# Altium PCB PCB.PcbDoc (part 3 of 3)
Units mil, origin at the board's own origin, x right, y up, seen from the top; angles counter-clockwise.
Board outline 3665 x 1860 mil, 2 copper layers (Top Layer, Bottom Layer); 191 components, 134 nets, 778 pads, 0 vias.
Unrouted connection lines stored in the file: 439.
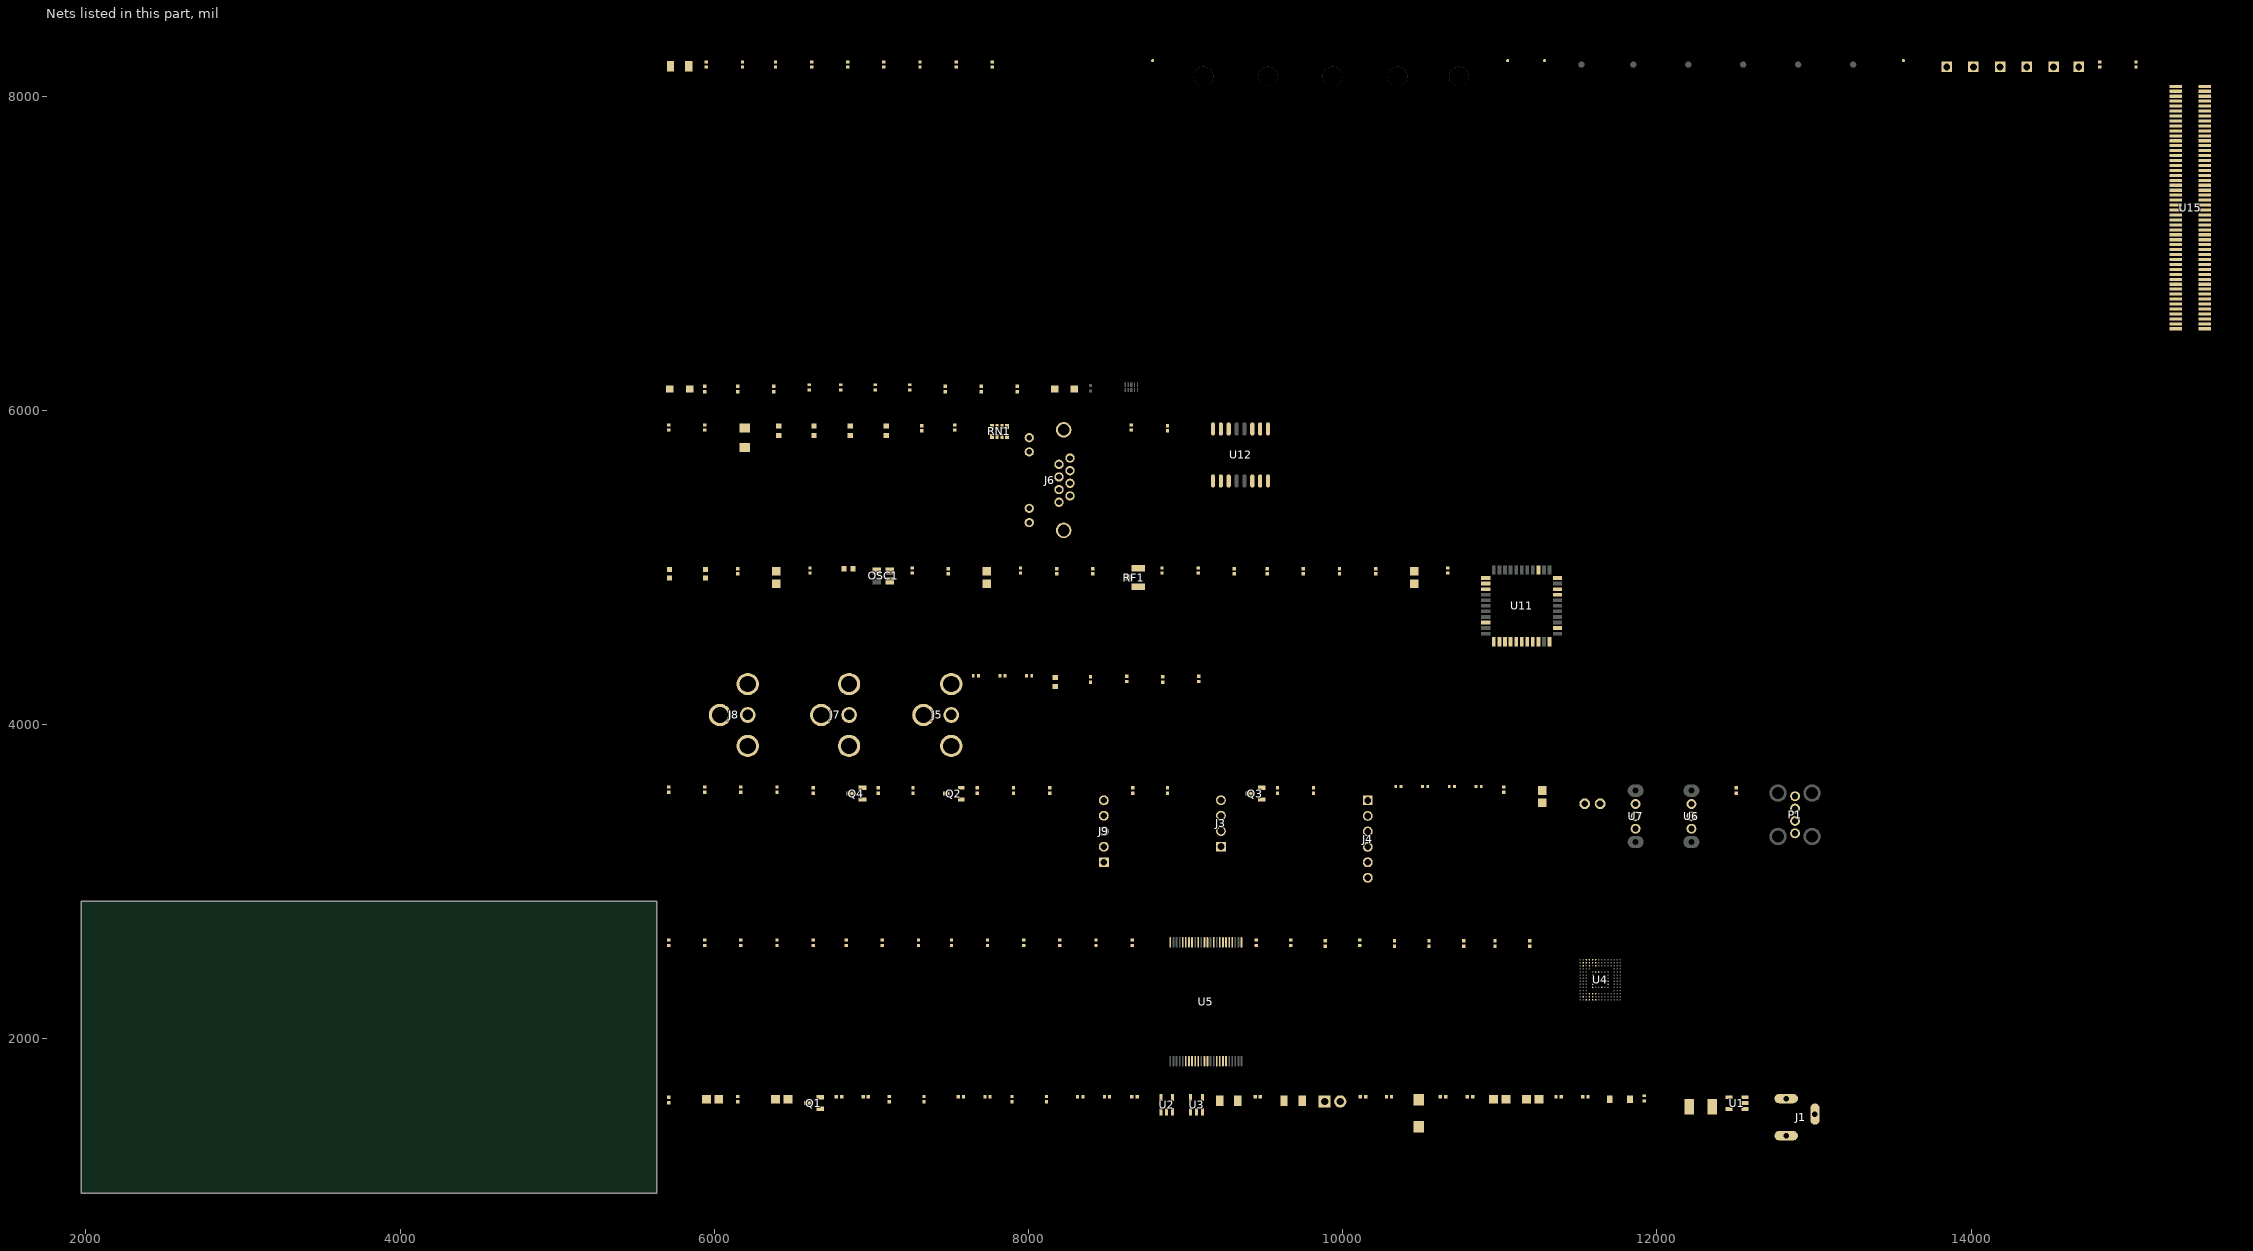
[diagram p2: the nets of this part, all layers, seen from the top]

## Nets (pads, with @x,y where several pads share a name; then routed paths per layer and width w, separated by ;. In a path a pad name is that pad's centre, name@x,y a point inside that pad or via, vN(x,y) a via of type N, cw(c..) or ccw(c..) an arc to the next point about the centre after c; other vN are vias at no path point) (continued)
NetC12_2: C12.2 U2.4
NetC13_2: C13.2 U3.4
NetC18_1: C18.1 C19.1 U4.C2
NetC41_2: C41.2 R28.1
NetC42_2: C42.2 R29.1
NetC45_1: C45.1 R36.1 RF1.1
NetC50_2: C50.2 C51.2 L2.2 OSC1.4
NetC52_1: C52.1 U12.2
NetC53_1: C53.1 U12.7
NetC54_1: C54.1 R42.1 R43.1 R44.1 R45.1
NetD15_1: D15.1 R51.1
NetJ3_2: J3.2 Q2.3 R21.2
NetJ6_1: J6.1 U12.16
NetJ6_2: J6.2 U12.14
NetJ6_3: J6.3 U12.11
NetJ6_4: J6.4 J6.5 R44.2
NetJ6_6: J6.6 U12.9
NetJ6_7: J6.7 J6.8 R45.2
NetJ6_9: J6.9 R40.2
NetJ6_11: J6.11 R41.2
NetL1_1: L1.1 U1.3
NetOSC1_3: OSC1.3 R39.2
NetQ3_1: Q3.1 R18.2 R24.2
NetQ3_3: Q3.3 R27.1
NetQ4_1: Q4.1 R19.2 R25.2
NetQ4_3: Q4.3 R26.1
NetR37_2: R37.2 U11.24
NetR42_2: R42.2 U12.10
NetR43_2: R43.2 U12.15
NetRN1_5: RN1.5 U12.8
NetRN1_6: RN1.6 U12.6
NetRN1_7: RN1.7 U12.3
NetRN1_8: RN1.8 U12.1
NRB0: R16.1 U5.7
NRB1: R14.1 R15.2
NRBX: R15.1 U5.6
NRE: U5.8 U15.29
NWE: U5.18 U15.10
NWP: C17.1 R11.1 U5.19
PWR-LED: R18.1 U15.8
PWR-STB: R9.2 U3.3
RECOVERY: R20.1 U6.1 U6.2 U15.62
STATUS-LED: R19.1 U15.4
TV-OUT: D9.2 J5.2 R30.2 U15.15
TX1-CEC: D14.2 R50.2 R51.2
TX1-DSCL: D13.2 R47.1 U15.16
TX1-DSDA: D12.2 R48.1 U15.20
TX1-HPD: R46.1 R49.2 U15.12
UBOOT: D6.1 U7.1 U7.2 U15.58
USB-DM: D4.2 P1.2 U15.91
USB-DP: D5.2 P1.3 U15.93
VBAT: C47.2 C48.2 FB2.2 U11.9
VCC-3V3: C7.2 C8.2 C14.2 H5.1 L2.1 Q1.2 R8.1 U2.5
VCC-5V: C1.2 C2.2 C6.2 C9.2 D2.1 R1.2 R5.2 U1.4 U2.1 U2.3 U3.1
VCC-IO: C15.2 C16.2 C21.1 C22.1 C23.1 C24.1 C25.1 C26.1 C27.1 C28.1 C29.1 C30.1 C31.1 C32.1 C33.1 C60.1 C61.1 C62.1 C63.1 C64.1 C65.1 C66.1 C67.1 C68.1 D15.2 H6.1 J3.4 J4.6 Q1.3 Q2.1 R7.1 R11.2 R12.2 R13.2 R14.2 R16.2 R17.2 R40.1 R41.1 U4.C6 U4.E6 U4.F5 U4.J10 U4.M4 U4.N4 U4.P3 U4.P5 U5.12 U5.34 U5.37 U5.39 U15.27 U15.34 U15.37 U15.54 U15.69 U15.71 U15.89
VCC-IO-EN: Q1.1 R10.1
VCC-IR-1: C37.2 J9.1 R23.2
VCC-RTC: J4.3 R8.2 R9.1 R20.2 R23.1
VCC-WIFI-IO: C3.2 C4.2 C5.1 FB1.1 FB2.1 H2.1 L1.2 R2.2 R31.2 R32.2 R33.2 R34.2 R35.2
VDD-IO: C43.2 C44.2 FB1.2 U11.22
VPS0: R12.1 U5.36
VPS1: C20.1 R13.1 U5.28
WIFI-EN: R38.1 U11.12 U15.92
WIFI-IO-FB: C5.2 R2.1 R4.2 U1.5
WIFI-POWER-EN: R3.1 U15.88
WIFI-PWR-STB: R1.1 R3.2 U1.1
WL-SDIO-CLK: C49.2 R38.2 U11.17 U15.48
WL-SDIO-CMD: R33.1 U11.16 U15.46
WL-SDIO-D0: R31.1 U11.18 U15.96
WL-SDIO-D1: R32.1 U11.19 U15.94
WL-SDIO-D2: R34.1 U11.14 U15.99
WL-SDIO-D3: R35.1 U11.15 U15.50
WL-WAKE-HOST: U11.13 U15.84
XTAL2: R39.1 U11.30
pads on no net: C57.1 C57.2 MARK1.1 MARK2.1 MARK3.1 MARK4.1 MARK5.1 MARK6.1 OSC1.1 P1.5 SCREW1.1 SCREW2.1 SCREW3.1 SCREW4.1 SCREW5.1 U4.A1 U4.A2 U4.A7 U4.A8 U4.A9 U4.A10 U4.A11 U4.A12 U4.A13 U4.A14 U4.B1 U4.B7 U4.B8 U4.B9 U4.B10 U4.B11 U4.B12 U4.B13 U4.B14 U4.C1 U4.C3 U4.C5 U4.C7 U4.C8 U4.C9 U4.C10 U4.C11 U4.C12 U4.C13 U4.C14 U4.D1 U4.D2 U4.D3 U4.D4 U4.D12 U4.D13 U4.D14 U4.E1 U4.E2 U4.E3 U4.E5 U4.E8 U4.E9 U4.E10 U4.E12 U4.E13 U4.E14 U4.F1 U4.F2 U4.F3 U4.F10 U4.F12 U4.F13 U4.F14 U4.G1 U4.G2 U4.G3 U4.G10 U4.G12 U4.G13 U4.G14 U4.H1 U4.H2 U4.H3 U4.H5 U4.H12 U4.H13 U4.H14 U4.J1 U4.J2 U4.J3 U4.J12 U4.J13 U4.J14 U4.K1 U4.K2 U4.K3 U4.K6 U4.K7 U4.K9 U4.K10 U4.K12 U4.K13 U4.K14 U4.L1 U4.L2 U4.L3 U4.L12 U4.L13 U4.L14 U4.M1 U4.M2 U4.M3 U4.M7 U4.M8 U4.M9 U4.M10 U4.M11 U4.M12 U4.M13 U4.M14 U4.N1 U4.N3 U4.N6 U4.N7 U4.N8 U4.N9 U4.N10 U4.N11 U4.N12 U4.N13 U4.N14 U4.P1 U4.P2 U4.P7 U4.P8 U4.P9 U4.P10 U4.P11 U4.P12 U4.P13 U4.P14 U5.1 U5.2 U5.3 U5.4 U5.5 U5.11 U5.14 U5.15 U5.20 U5.21 U5.22 U5.23 U5.24 U5.26 U5.27 U5.33 U5.35 U5.38 U5.40 U5.45 U5.46 U5.47 U6.4 U6.5 U7.4 U7.5 U11.4 U11.5 U11.6 U11.7 U11.8 U11.10 U11.11 U11.21 U11.23 U11.25 U11.26 U11.27 U11.28 U11.29 U11.32 U11.34 U11.35 U11.37 U11.38 U11.39 U11.40 U11.41 U11.42 U11.43 U11.44 U12.4 U12.5 U12.12 U12.13 U13.1 U13.2 U13.3 U13.4 U13.5 U13.6 U13.7 U13.8 U13.9 U13.10

## Keep-outs
Keep-Out Layer:
  the board outline again, w10

## Text inside footprints (layer, text, board x,y; h text height)
C34: Top Overlay "+" at 11510,3535 h39.4; Top Overlay "-" at 11630,3530 h39.4